# EAGLE board PhotoBooth_04 (EAGLE 6.3)
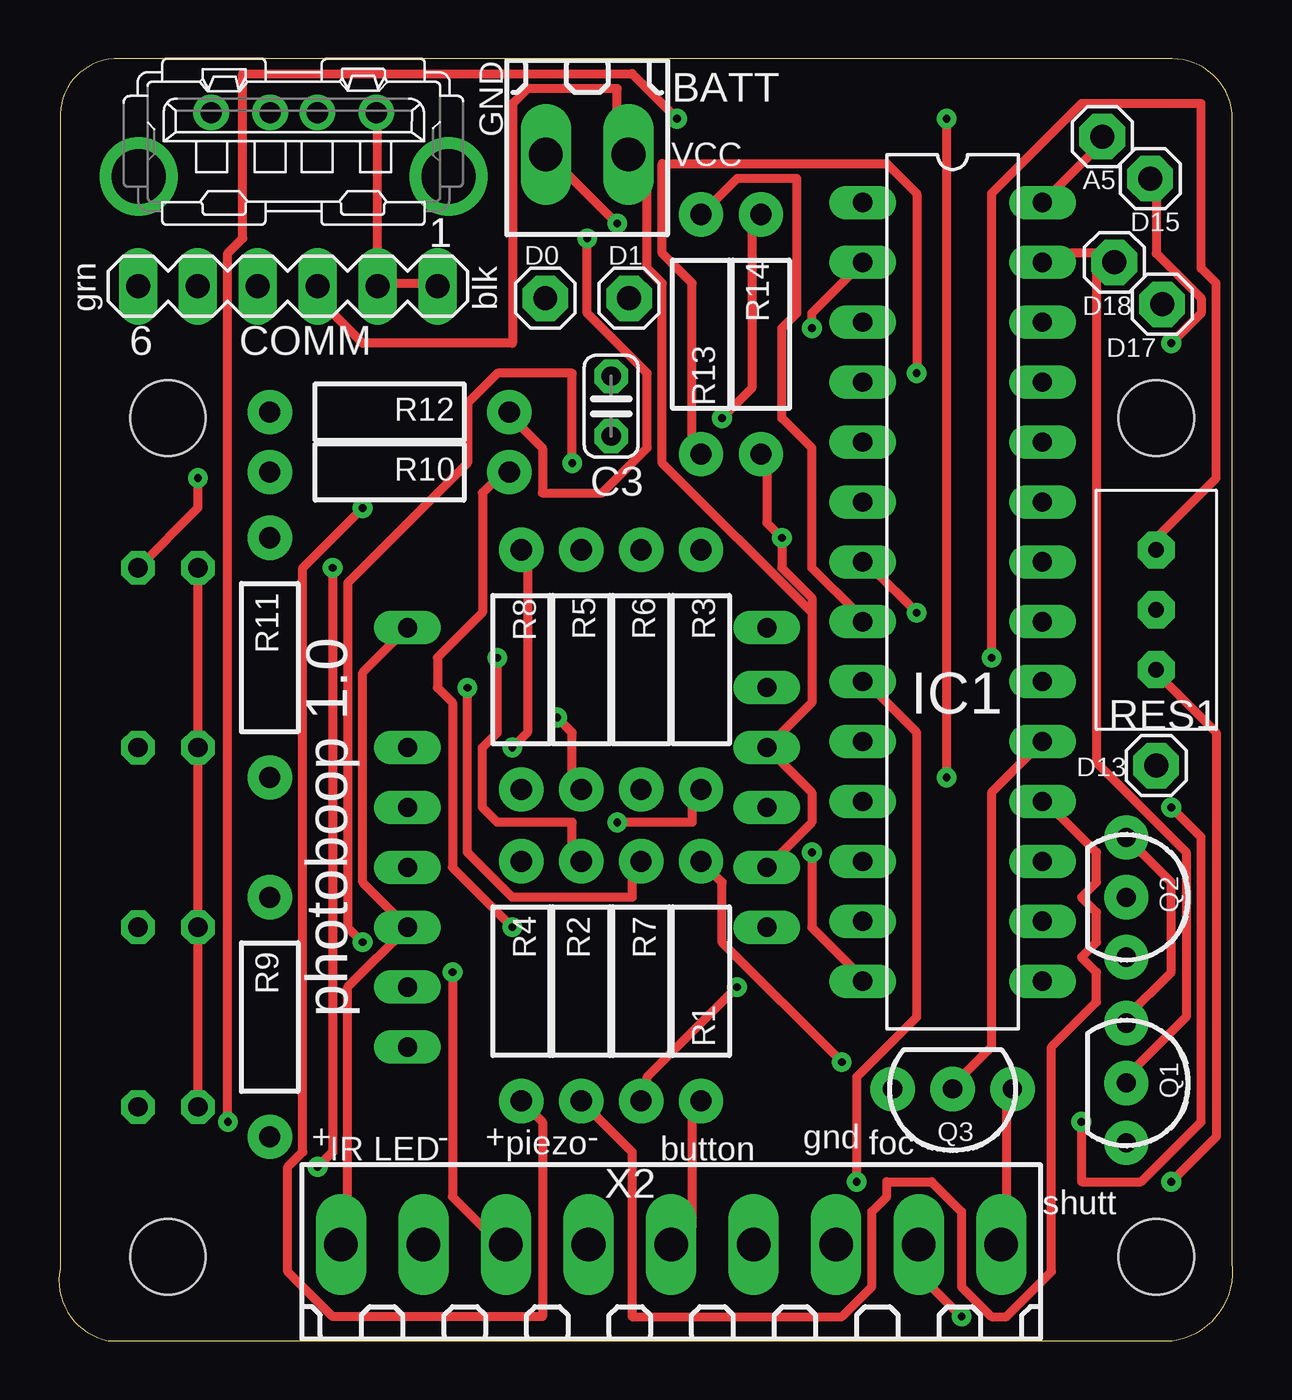
[diagram p0: board, top side]
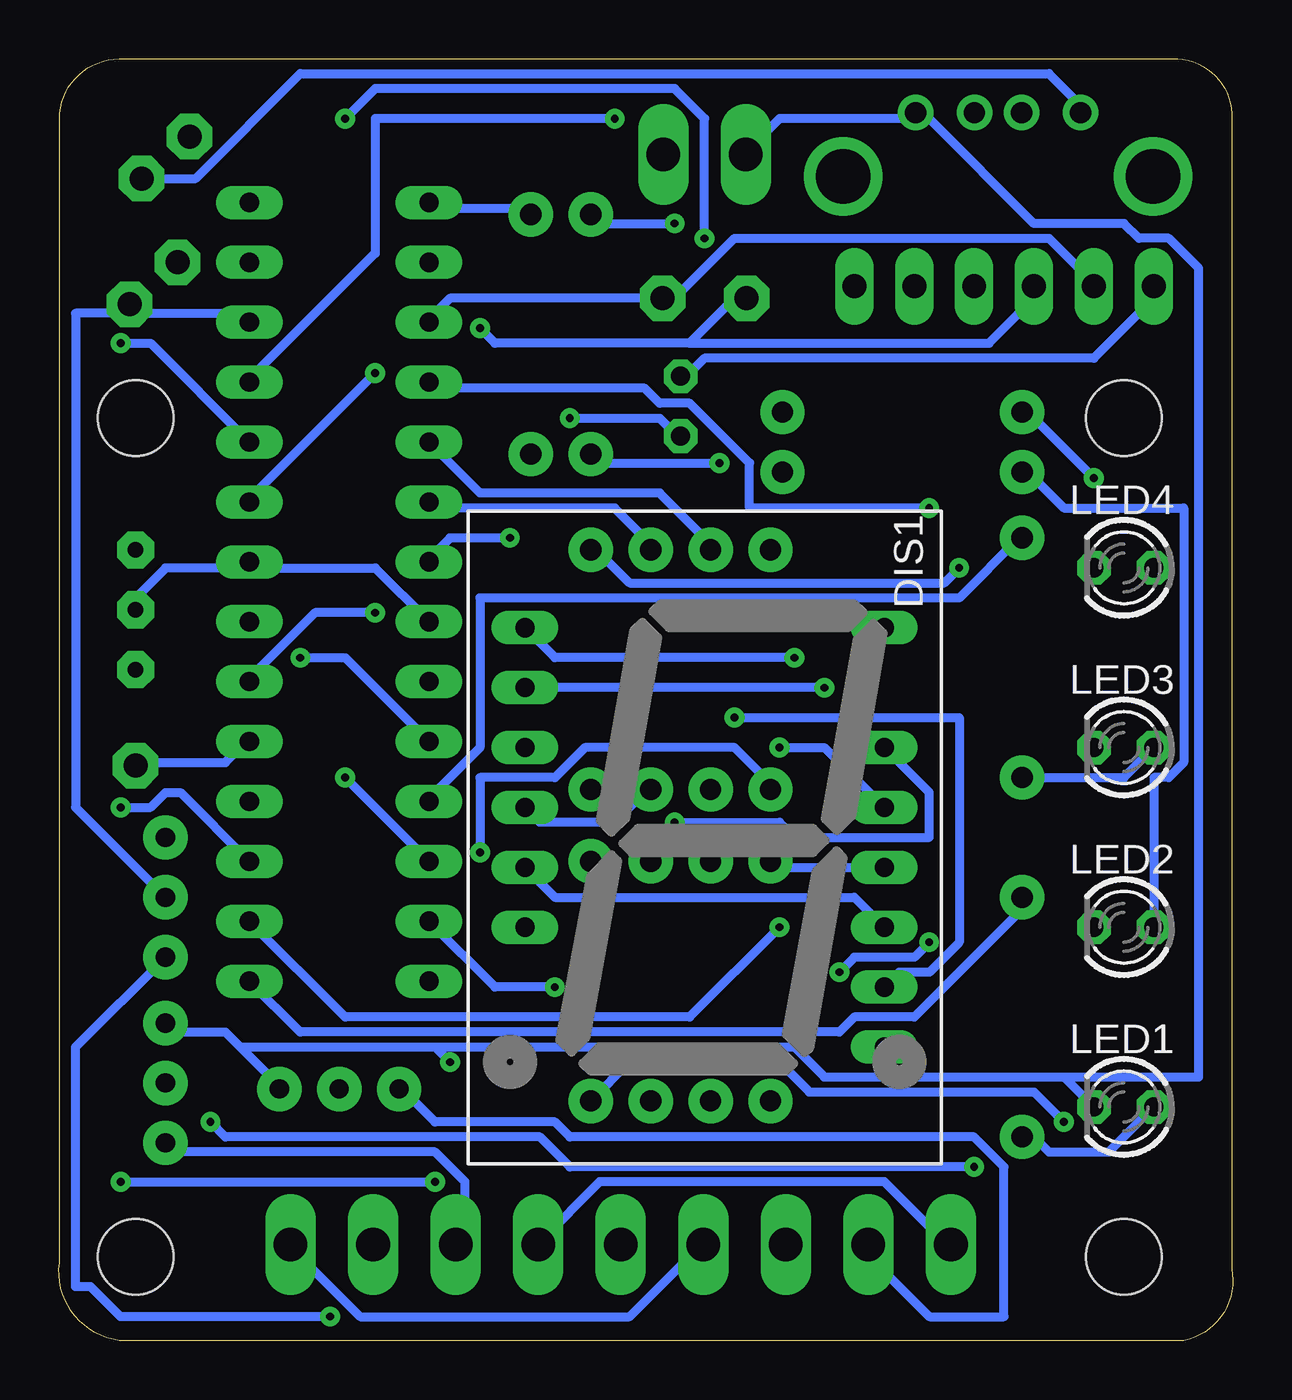
[diagram p1: board, bottom side, seen from below]

Size 49.78 x 54.35 mm. Coordinates in mm from the lower left corner, seen from the top.
Outline: 47.22,0 arc90 49.76,3.3 49.76,51.81 arc90 47.22,54.35 2.34,54.35 arc90 0.05,51.81 0.05,3.05 arc90 2.08,0 47.22,0
Copper layers (1*16): Top 0.0356mm / dielectric 1.5011mm / Bottom 0.0356mm
Design rules "LaenPCBOrder *": minimum track width 6mil, minimum drill 13mil, track to track 6mil, track to pad 6mil, pad to pad 6mil, via to via 6mil, smd to smd 6mil, copper to edge 15mil, drill to drill 6mil, minimum pad ring 12mil, minimum via ring 10mil, stop-mask expansion 4mil, vias tented up to drill 15mil, thermal gap 10mil
Net classes: 0 default: width 0.381 mm
Holes 3.2 mm at 4.62,3.56 4.62,39.12 46.53,3.56 46.53,39.12

## Footprints (pad centres in the part's own frame; a part is rotated, then mirrored left to right if it is on the bottom)
1X01 = drill 1.016 pad 1.93 octagon: 1 0,0
180-2 = drill 1.422 long: 1 -1.75,0; 2 1.75,0
C025-024X044 = drill 0.813 octagon: 1 -1.27,0; 2 1.27,0
MA06-1 = drill 1.016 long: 1 -6.35,0; 2 -3.81,0; 3 -1.27,0; 4 1.27,0; 5 3.81,0; 6 6.35,0
HDSP-Q = drill 0.813 long: 2 -7.62,8.89; 3 -7.62,6.35; 4 -7.62,3.81; 5 -7.62,1.27; 6 -7.62,-1.27; 7 -7.62,-3.81; 10 7.62,-8.89; 11 7.62,-6.35; 12 7.62,-3.81; 13 7.62,-1.27; 14 7.62,1.27; 15 7.62,3.81; 17 7.62,8.89
DIL28-3 = drill 0.813 long: 1 -16.51,-3.81; 2 -13.97,-3.81; 3 -11.43,-3.81; 4 -8.89,-3.81; 5 -6.35,-3.81; 6 -3.81,-3.81; 7 -1.27,-3.81; 8 1.27,-3.81; 9 3.81,-3.81; 10 6.35,-3.81; 11 8.89,-3.81; 12 11.43,-3.81; 13 13.97,-3.81; 14 16.51,-3.81; 15 16.51,3.81; 16 13.97,3.81; 17 11.43,3.81; 18 8.89,3.81; 19 6.35,3.81; 20 3.81,3.81; 21 1.27,3.81; 22 -1.27,3.81; 23 -3.81,3.81; 24 -6.35,3.81; 25 -8.89,3.81; 26 -11.43,3.81; 27 -13.97,3.81; 28 -16.51,3.81
LED3MM = drill 0.813 octagon: A -1.27,0; K 1.27,0
TO-92-AMMO = drill 0.813 pad 1.88: 1 -2.54,0; 2 0,0; 3 2.54,0
AXIAL-0.4 = drill 0.9 pad 1.88: P$1 -5.08,0; P$2 5.08,0
RESONZTT = drill 0.66 pad 1.575 octagon: 1 0,0; 2 2.54,0; 3 5.08,0
KUSBVX = drill 0.9 pad 1.3: 1 3.5,0; 2 1,0; 3 -1,0; 4 -3.5,0 | drill 2.3 pad 2.8: M1 -6.57,2.71; M2 6.57,2.71
180-9 = drill 1.422 long: 1 -14,0; 2 -10.5,0; 3 -7,0; 4 -3.5,0; 5 0,0; 6 3.5,0; 7 7,0; 8 10.5,0; 9 14,0

## Placement (x,y rotation side)
A5  [1X01]  44.25,51.05 0 top
BATT  [180-2]  22.4,50.29 180 top
C3  0.1uF  [C025-024X044]  23.42,39.62 270 top
COMM  [MA06-1]  9.7,44.7 180 top
D0  [1X01]  20.62,44.2 180 top
D1  [1X01]  24.18,44.2 180 top
D13  [1X01]  46.53,24.38 0 top
D15  [1X01]  46.28,49.28 0 top
D17  [1X01]  46.79,43.94 0 top
D18  [1X01]  44.75,45.72 0 top
DIS1  HD-N105  [HDSP-Q]  22.4,21.34 0 bottom
IC1  ATMEGA328-P  [DIL28-3]  37.9,31.75 270 top
LED1  [LED3MM]  4.62,9.91 180 bottom
LED2  [LED3MM]  4.62,17.53 180 bottom
LED3  [LED3MM]  4.62,25.15 180 bottom
LED4  [LED3MM]  4.62,32.77 180 bottom
Q1  2N3904  [TO-92-AMMO]  45.26,10.92 270 top
Q2  2N3904  [TO-92-AMMO]  45.26,18.8 270 top
Q3  2N3904  [TO-92-AMMO]  37.9,10.67 180 top
R1  10k  [AXIAL-0.4]  27.23,15.24 90 top
R2  220  [AXIAL-0.4]  22.15,15.24 270 top
R3  220  [AXIAL-0.4]  27.23,28.45 90 top
R4  220  [AXIAL-0.4]  19.61,15.24 270 top
R5  220  [AXIAL-0.4]  22.15,28.45 90 top
R6  220  [AXIAL-0.4]  24.69,28.45 90 top
R7  220  [AXIAL-0.4]  24.69,15.24 270 top
R8  220  [AXIAL-0.4]  19.61,28.45 270 top
R9  220  [AXIAL-0.4]  8.94,13.72 270 top
R10  220  [AXIAL-0.4]  14.02,36.83 180 top
R11  220  [AXIAL-0.4]  8.94,28.96 270 top
R12  220  [AXIAL-0.4]  14.02,39.37 180 top
R13  10M  [AXIAL-0.4]  27.23,42.67 90 top
R14  10k  [AXIAL-0.4]  29.77,42.67 90 top
RES1  [RESONZTT]  46.53,33.53 270 top
X1  USBVX  [KUSBVX]  9.96,52.07 180 top
X2  [180-9]  25.96,4.06 0 top

## Library data of the parts
A5 D0 D1 D13 D15 D17 D18 = pinhead-ez
BATT X2 = con-weidmueller-sl35; OC_FARNELL: unknown; OC_NEWARK: unknown
C3 = rcl
COMM = con-lstb; OC_FARNELL: unknown; OC_NEWARK: unknown
DIS1 = display-hp; OC_FARNELL: unknown; OC_NEWARK: unknown
IC1 = atmel; OC_FARNELL: unknown; OC_NEWARK: unknown
LED1-LED4 = led
Q1-Q3 R1-R14 = SparkFun
RES1 = ADS
X1 = con-kycon

## Nets
A_SEGMENT: IC1.18 R2.P$2
B_SEGMENT: IC1.17 R3.P$2
BUTTON: IC1.25 R1.P$1 X2.5
C_SEGMENT: IC1.4 R4.P$2
CAMERA: D15.1 IC1.24 X1.1
D_SEGMENT: IC1.5 R5.P$2
DIR: C3.1 COMM.6
E_SEGMENT: IC1.6 R6.P$2
F_SEGMENT: IC1.13 R7.P$2
G_SEGMENT: IC1.14 R8.P$2
GND: BATT.2 COMM.1 COMM.2 IC1.8 IC1.22 LED1.K LED2.K LED3.K LED4.K Q1.1 Q2.1 Q3.1 R1.P$2 R13.P$2 RES1.2 X1.4 X2.4 X2.9
IR_LED: D13.1 IC1.19 Q3.2
N$1: LED1.A R9.P$2
N$2: DIS1.14 R8.P$1
N$3: DIS1.3 R7.P$1
N$4: DIS1.5 R6.P$1
N$5: DIS1.11 R5.P$1
N$6: DIS1.13 R4.P$1
N$7: LED2.A R10.P$2
N$8: DIS1.15 R3.P$1
N$9: DIS1.2 R2.P$1
N$10: LED3.A R11.P$2
N$11: LED4.A R12.P$2
N$12: Q1.3 X2.7
N$13: IC1.10 RES1.1
N$14: IC1.9 RES1.3
N$15: C3.2 IC1.1 R14.P$2
N$16: A5.1 IC1.28
N$17: Q2.3 X2.8
N$18: Q3.3 X2.2
N$23: COMM.4 D0.1 IC1.2
N$24: COMM.5 D1.1 IC1.3
NUM1: IC1.15 R9.P$1
NUM2: IC1.16 R10.P$1
NUM3: IC1.11 R11.P$1
NUM4: IC1.12 R12.P$1
PIEZO: IC1.23 R13.P$1 X2.3
VCC: BATT.1 COMM.3 DIS1.4 DIS1.6 DIS1.12 DIS1.17 IC1.7 IC1.20 R14.P$1 X2.1 X2.6
WIRED_FOCUS: D17.1 IC1.26 Q2.2
WIRED_SHUTTER: D18.1 IC1.27 Q1.2

## Tracks (layer width: path | path; a pad name or v marks a point on that pad's centre or on a via)
A_SEGMENT
  Top 0.381: R2.P$2 24.31,8 24.31,1.02 33.2,1.02 34.47,2.29 34.47,5.46 35.1,6.1 35.1,6.73 37.01,6.73 38.28,5.46 38.28,2.29 39.55,1.02 40.18,1.02 42.09,2.92 42.09,12.45 43.99,14.35 43.99,15.62 43.36,16.26 43.99,16.89 43.99,18.16 43.36,18.8 43.99,19.43 43.99,20.7 42.09,22.61 IC1.18
B_SEGMENT  (via drill 0.33)
  Top 0.381: v47.17,22.61 48.44,21.34 48.44,9.27 45.9,6.73 43.36,6.73 v43.36,9.27 | v10.97,7.37 11.61,8 v11.61,32.77
  Bottom 0.381: IC1.17 44.63,23.24 45.26,23.24 45.9,22.61 v47.17,22.61 | v43.36,9.27 42.72,8.64 29.39,8.64 28.12,7.37 v10.97,7.37 | v11.61,32.77 12.24,32.13 25.58,32.13 26.85,33.4 R3.P$2
BUTTON  (via drill 0.33)
  Top 0.381: v26.21,51.82 24.31,53.72 7.8,53.72 7.8,46.74 7.16,46.1 v7.16,9.27 | X2.5 26.21,4.19 26.85,4.83 26.85,9.91 R1.P$1
  Bottom 0.381: v26.21,51.82 36.37,51.82 36.37,46.1 41.45,41.02 IC1.25 | v7.16,9.27 8.43,10.54 17.96,10.54 19.23,11.81 25.58,11.81 R1.P$1
C_SEGMENT  (via drill 0.33)
  Top 0.381: v12.88,35.31 10.34,32.77 10.34,8 9.7,7.37 9.7,2.92 11.61,1.02 20.5,1.02 20.5,9.27 R4.P$2
  Bottom 0.381: v12.88,35.31 20.5,35.31 20.5,37.21 23.04,39.75 24.31,39.75 24.94,40.39 33.83,40.39 IC1.4
CAMERA  (via drill 0.33)
  Top 0.381: v47.17,42.29 48.44,43.56 48.44,44.2 46.53,46.1 46.53,49.28 D15.1
  Bottom 0.381: IC1.24 45.9,42.29 v47.17,42.29 | D15.1 43.99,49.28 39.55,53.72 7.8,53.72 6.53,52.45 X1.1
D_SEGMENT
  Bottom 0.381: IC1.5 31.93,35.94 24.31,35.94 22.4,34.04 R5.P$2
DIR
  Bottom 0.381: C3.1 23.04,41.02 22.4,41.66 5.89,41.66 3.35,44.2 COMM.6
E_SEGMENT
  Bottom 0.381: IC1.6 33.83,35.31 26.21,35.31 24.94,34.04 R6.P$2
F_SEGMENT  (via drill 0.33)
  Top 0.381: v28.75,14.99 24.94,11.18 24.94,10.54 R7.P$2
  Bottom 0.381: IC1.13 31.29,14.99 v28.75,14.99
G_SEGMENT  (via drill 0.33)
  Top 0.381: v31.93,20.7 31.93,17.53 33.83,15.62 IC1.14
  Bottom 0.381: v31.93,20.7 31.93,23.88 28.75,23.88 27.48,25.15 21.13,25.15 19.86,23.88 R8.P$2
GND  (via drill 0.33)
  Top 0.381: 13.51,44.83 13.51,51.82 X1.4 | 13.51,44.83 16.05,44.83 COMM.1 | 13.51,44.83 COMM.2 | R13.P$2 28.75,49.28 31.29,49.28 31.29,43.56 30.66,42.93 30.66,39.12 31.93,37.85 31.93,32.77 33.83,30.86 IC1.8 | v23.67,47.37 21.13,49.91 BATT.2 | LED1.K LED2.K LED3.K LED4.K | R1.P$2 28.12,19.43 28.12,16.89 v33.2,11.81 | Q2.1 47.17,19.43 47.17,15.62 45.26,13.72 Q1.1 | X2.9 40.18,4.19 40.18,10.54 Q3.1
  Bottom 0.381: BATT.2 20.5,50.55 19.23,51.82 13.51,51.82 X1.4 12.88,51.82 8.43,47.37 4.62,47.37 3.99,46.74 2.72,46.74 1.45,45.47 1.45,11.18 7.16,11.18 | IC1.8 36.37,32.77 41.45,32.77 IC1.22 42.09,32.77 45.26,32.77 46.53,31.5 RES1.2 | v23.67,47.37 26.85,47.37 R13.P$2 | X2.4 23.04,3.56 25.58,1.02 37.01,1.02 39.55,3.56 X2.9 | 42.09,12.45 42.72,13.08 45.26,13.08 Q1.1 | 42.09,12.45 40.82,11.18 Q3.1 | 33.83,12.45 v33.2,11.81 | 42.09,12.45 33.83,12.45 | 7.16,11.18 LED1.K | 7.16,11.18 17.32,11.18 18.59,12.45 33.83,12.45
IR_LED
  Top 0.381: IC1.19 39.55,23.24 39.55,12.45 38.28,11.18 Q3.2
  Bottom 0.381: IC1.19 42.09,25.15 42.72,24.51 46.53,24.51 D13.1
N$1
  Bottom 0.381: LED1.A 5.26,8 7.8,8 8.43,8.64 R9.P$2
N$2  (via drill 0.33)
  Top 0.381: v19.23,25.15 19.86,25.78 19.86,33.4 R8.P$1
  Bottom 0.381: DIS1.14 17.32,25.15 v19.23,25.15
N$3  (via drill 0.33)
  Top 0.381: v17.32,27.69 17.32,20.7 19.23,18.8 24.31,18.8 24.31,20.07 R7.P$1
  Bottom 0.381: v17.32,27.69 DIS1.3
N$4
  Bottom 0.381: DIS1.5 29.39,21.97 26.21,21.97 24.94,23.24 R6.P$1
N$5  (via drill 0.33)
  Top 0.381: v21.13,26.42 21.77,25.78 21.77,23.88 R5.P$1
  Bottom 0.381: DIS1.11 14.15,15.62 12.88,15.62 11.61,16.89 11.61,26.42 v21.13,26.42
N$6
  Bottom 0.381: DIS1.13 19.23,20.07 R4.P$1
N$7
  Bottom 0.381: LED2.A 3.35,23.88 2.72,23.88 2.08,24.51 2.08,35.31 7.16,35.31 8.43,36.58 R10.P$2
N$8  (via drill 0.33)
  Top 0.381: v23.67,21.97 26.85,21.97 26.85,23.24 R3.P$1
  Bottom 0.381: DIS1.15 12.88,23.24 12.88,21.34 18.59,21.34 19.23,21.97 v23.67,21.97
N$9  (via drill 0.33)
  Top 0.381: v18.59,28.96 18.59,25.78 17.96,25.15 17.96,22.61 18.59,21.97 21.77,21.97 21.77,20.7 R2.P$1
  Bottom 0.381: DIS1.2 28.75,28.96 v18.59,28.96
N$10
  Bottom 0.381: LED3.A 4.62,23.88 R11.P$2
N$11  (via drill 0.33)
  Top 0.381: LED4.A 5.89,35.31 v5.89,36.58
  Bottom 0.381: v5.89,36.58 8.43,39.12 R12.P$2
N$12
  Bottom 0.381: Q1.3 45.26,8 33.83,8 32.56,6.73 32.56,4.19 X2.7
N$13  (via drill 0.33)
  Top 0.381: v39.55,28.96 39.55,48.64 43.36,52.45 48.44,52.45 48.44,45.47 49.07,44.83 49.07,36.58 46.53,34.04 RES1.1
  Bottom 0.381: IC1.10 37.64,28.96 v39.55,28.96
N$14  (via drill 0.33)
  Top 0.381: v33.83,6.73 33.83,11.18 36.37,13.72 36.37,25.78 34.47,27.69 IC1.9 | v47.17,6.73 49.07,8.64 49.07,25.78 46.53,28.32 RES1.3
  Bottom 0.381: v47.17,6.73 v33.83,6.73
N$15  (via drill 0.33)
  Top 0.381: v28.12,39.12 29.39,40.39 29.39,47.37 R14.P$2
  Bottom 0.381: v28.12,39.12 24.31,39.12 23.67,38.48 C3.2 | IC1.1 33.83,48.01 30.02,48.01 R14.P$2
N$16
  Top 0.381: IC1.28 43.99,50.55 A5.1
N$17  (via drill 0.33)
  Top 0.381: v38.28,1.02 37.01,2.29 37.01,3.56 X2.8
  Bottom 0.381: Q2.3 49.07,12.45 49.07,2.29 48.44,2.29 47.17,1.02 v38.28,1.02
N$18
  Bottom 0.381: Q3.3 35.1,10.54 33.83,9.27 28.75,9.27 28.12,8.64 10.97,8.64 9.7,7.37 9.7,1.02 12.88,1.02 15.42,3.56 X2.2
N$23  (via drill 0.33)
  Top 0.381: IC1.2 31.93,43.56 v31.93,42.93
  Bottom 0.381: v31.93,42.93 31.29,42.29 23.04,42.29 | 23.04,42.29 21.13,44.2 D0.1 | 23.04,42.29 10.34,42.29 8.43,44.2 COMM.4
N$24
  Bottom 0.381: IC1.3 33.83,43.56 33.2,44.2 D1.1 23.67,44.2 21.13,46.74 7.8,46.74 5.89,44.83 COMM.5
NUM1
  Bottom 0.381: IC1.15 39.55,13.08 16.69,13.08 16.05,13.72 13.51,13.72 8.43,18.8 R9.P$1
NUM2  (via drill 0.33)
  Top 0.381: v19.23,17.53 16.69,20.07 16.69,27.05 16.05,27.69 16.05,28.96 17.96,30.86 17.96,35.94 18.59,36.58 R10.P$1
  Bottom 0.381: IC1.16 37.64,13.72 23.04,13.72 v19.23,17.53
NUM3
  Bottom 0.381: IC1.11 33.83,23.24 31.93,25.15 31.93,31.5 11.61,31.5 9.07,34.04 R11.P$1
NUM4  (via drill 0.33)
  Top 0.381: v37.64,51.82 v37.64,23.88 | v22.4,46.74 22.4,43.56 24.94,41.02 24.94,37.85 23.04,35.94 20.5,35.94 20.5,37.85 19.23,39.12 R12.P$1
  Bottom 0.381: v37.64,23.88 IC1.12 | v37.64,51.82 36.37,53.09 23.67,53.09 22.4,51.82 v22.4,46.74
PIEZO  (via drill 0.33)
  Top 0.381: v36.37,41.02 36.37,48.64 35.1,49.91 25.58,49.91 25.58,46.1 26.85,44.83 26.85,37.85 R13.P$1 | v16.69,15.62 16.69,6.1 18.59,4.19 X2.3 | v12.88,16.89 12.24,17.53 12.24,32.13 17.32,37.21 17.32,39.75 18.59,41.02 21.77,41.02 v21.77,37.21
  Bottom 0.381: v36.37,41.02 41.45,35.94 IC1.23 | v16.69,15.62 16.05,16.26 13.51,16.26 v12.88,16.89 | v21.77,37.21 26.85,37.21 R13.P$1
VCC  (via drill 0.33)
  Top 0.381: X2.1 12.24,4.19 12.24,14.99 DIS1.12 12.88,19.43 12.88,28.32 DIS1.17 | COMM.3 10.97,44.2 12.88,42.29 19.23,42.29 19.23,52.45 19.86,53.09 23.67,53.09 23.67,50.55 BATT.1 24.31,49.91 24.94,49.28 24.94,45.47 25.58,44.83 25.58,37.21 31.93,30.86 | DIS1.6 31.93,21.97 31.93,23.24 DIS1.4 31.93,27.05 31.93,30.86 | R14.P$1 30.02,37.21 30.02,34.67 v30.66,34.04 30.66,32.77 31.93,31.5 31.93,30.86 | v36.37,30.86 34.47,32.77 IC1.7
  Bottom 0.381: X2.6 29.39,4.19 26.85,6.73 14.78,6.73 12.24,4.19 X2.1 | v30.66,34.04 33.2,34.04 33.83,33.4 IC1.7 | v36.37,30.86 38.91,30.86 41.45,28.32 IC1.20 | DIS1.12 16.05,18.8 28.75,18.8 DIS1.6
WIRED_FOCUS
  Bottom 0.381: IC1.26 42.09,43.56 46.53,43.56 D17.1 47.17,43.56 49.07,43.56 49.07,22.61 Q2.2
WIRED_SHUTTER
  Top 0.381: 43.99,46.1 44.63,46.1 D18.1 43.99,46.1 | 43.99,46.1 42.09,46.1 IC1.27 | 43.99,46.1 43.99,24.51 47.8,20.7 47.8,13.72 45.26,11.18 Q1.2

## Text on the board
tNames: GND | VCC | grn | blk | photoboop 1.0 | piezo | button | + | IR LED | - | + | - | gnd | foc | shutt